# Altium PCB PCB_RULER.PcbDoc
Units mm, origin at the board's own origin, x right, y up, seen from the top; angles counter-clockwise.
Board outline 208.45 x 25.4 mm, 2 copper layers (Top Layer, Bottom Layer); 75 components, 2 nets, 326 pads, 20 vias.
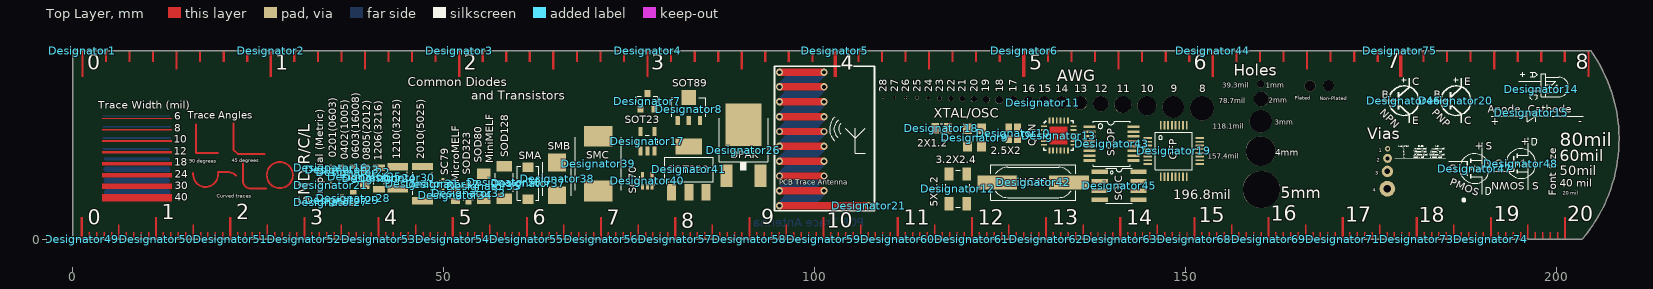
[diagram p0: Top Layer view]
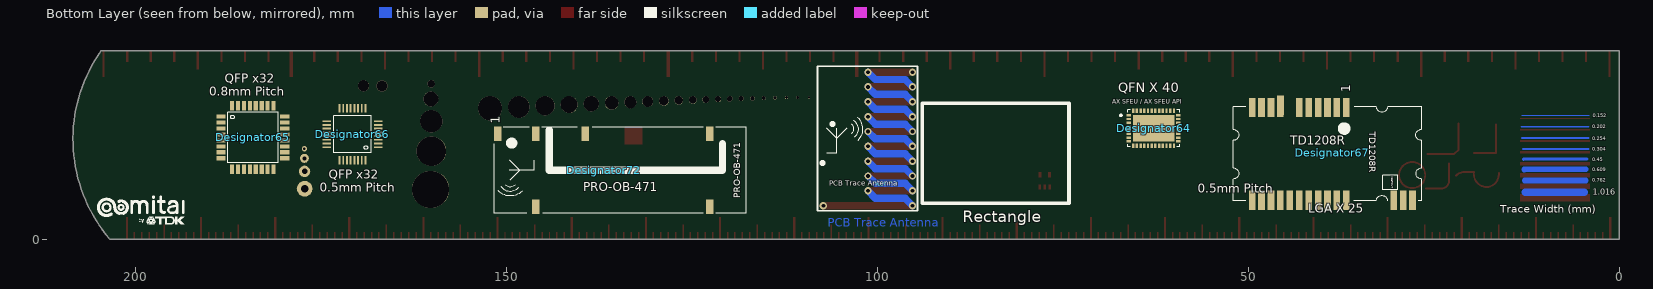
[diagram p1: Bottom Layer view, seen from below]

## Layer stack, top to bottom
Top Solder: solder mask 0.0102, Solder Resist, Dk 3.5
Top Layer: signal copper 0.0356
Dielectric1: dielectric 0.32, FR-4, Dk 4.8
Bottom Layer: signal copper 0.0356
Bottom Solder: solder mask 0.0102, Solder Resist, Dk 3.5

## Board outline
0,0 0,25.4 204.673,25.4 cw(c187.78,13.488) 203.444,0

## Design rules (kind name [scope] priority, off if disabled: settings)
Clearance [All] p1: gap=0.127 ignorepadtopadclearanceinfootprint=FALSE except(0: Arc-Hole Track-Hole SMDPad-Hole THPad-Hole Via-Hole Fill-Hole Poly-Hole Region-Hole Text-Hole)
HoleToHoleClearance [All] p1: gap=0.025 allowstackedmicrovias=TRUE
MinimumSolderMaskSliver [All] p1: minsoldermaskwidth=0.051
PolygonConnect [All] p1: connectstyle=Relief reliefconductorwidth=0.254 reliefentries=4 polygonreliefangle="90 Angle" airgapwidth=0.254
RoutingVias [All] p1: holewidth=0.711 width=1.27 viastyle="Through Hole" minholewidth=0.711 minwidth=1.27 maxholewidth=0.711 maxwidth=1.27
SilkToSilkClearance [All] p1: silktosilkclearance=0.051
SilkToSolderMaskClearance SilkscreenOverComponentPads [IsPad] p1: minsilkscreentomaskgap=0.051 clearancetoexposedcopper=TRUE
SolderMaskExpansion [All] p1: expansion=0.064 istentingtop=FALSE
Width [All] p1: maxlimit=0.254 minlimit=0.254 preferedwidth=0.254
26 further rules are at their usual default settings.

## Components (designator, comment, footprint, x,y, rotation, side; value= is the part's Value field where it differs from the comment)
Designator1 "Comment" EDGE-INCHES-EIGTH 1.27,25.4 r0 top (schematic designator E$17)
Designator2 "Comment" EDGE-INCHES-EIGTH 26.67,25.4 r0 top (schematic designator E$18)
Designator3 "Comment" EDGE-INCHES-EIGTH 52.07,25.4 r0 top (schematic designator E$19)
Designator4 "Comment" EDGE-INCHES-EIGTH 77.47,25.4 r0 top (schematic designator E$20)
Designator5 "Comment" EDGE-INCHES-EIGTH 102.72,25.4 r0 top (schematic designator E$21)
Designator6 "Comment" EDGE-INCHES-EIGTH 128.27,25.4 r0 top (schematic designator E$22)
Designator7 "Comment" SOT23-3 77.445,18.567 r0 top (schematic designator E$34)
Designator8 "Comment" SOT89 83.033,17.805 r0 top (schematic designator E$32)
Designator9 "Comment" CRYSTAL-SMD-3.2X2.5 121.564,13.716 r90 top (schematic designator E$37)
Designator10 "Comment" CRYSTAL-SMD-2.5X2 126.746,14.3 r90 top (schematic designator E$38)
Designator11 "Comment" ALL-HOLES 109.22,19.304 r0 top (schematic designator E$46)
Designator12 "Comment" CRYSTAL-SMD-5X3.2 119.304,6.807 r90 top (schematic designator E$36)
Designator13 "Comment" QFN-24 132.893,13.995 r0 top (schematic designator E$55)
Designator14 "Comment" LED-GUIDE 197.942,20.244 r270 top (schematic designator E$53)
Designator15 "Comment" DIODE-SYMB 196.647,17.069 r0 top (schematic designator E$52)
Designator16 "Comment" 0201 34.751,9.662 r90 top (schematic designator E$16)
Designator17 "Comment" SOT23-5 77.445,13.233 r0 top (schematic designator E$33)
Designator18 "Comment" XTAL-2X1.2 117.094,14.961 r0 top (schematic designator E$40)
Designator19 "Comment" TQFP32-5MM 148.412,11.913 r0 top (schematic designator E$58)
Designator20 "Comment" PNP-SYMB 186.461,18.694 r0 top (schematic designator E$59)
Designator21 "Comment" 0201 34.751,7.325 r90 top (schematic designator E$63)
Designator21 "Comment" "PCB antenna 868 MHz or 915/920 MHz" 107.264,4.547 r90 top
Designator22 "Comment" 0603 37.799,9.052 r90 top (schematic designator E$24)
Designator23 "Comment" 0402 36.275,9.357 r90 top (schematic designator E$23)
Designator24 "Comment" 1206 41.279,8.214 r90 top (schematic designator E$26)
Designator25 "Comment" 0805 39.323,8.468 r90 top (schematic designator E$25)
Designator26 "Comment" DPAK 90.399,13.868 r0 top (schematic designator E$29)
Designator27 "Comment" 0201 34.751,4.988 r90 top (schematic designator E$60)
Designator28 "Comment" 0603 37.799,5.572 r90 top (schematic designator E$62)
Designator29 "Comment" 0402 36.275,5.293 r90 top (schematic designator E$61)
Designator30 "Comment" 1210 43.79,8.306 r270 top (schematic designator E$27)
Designator31 "Comment" 2010 47.117,7.518 r90 top (schematic designator E$28)
Designator32 "Comment" SC79_INFINEON 49.886,7.417 r90 top (schematic designator E$42)
Designator33 "Comment" SOD-323 53.34,6.198 r270 top (schematic designator E$48)
Designator34 "Comment" MICROMELF-R 51.562,5.944 r90 top (schematic designator E$41)
Designator35 "Comment" SOD80C 55.372,7.137 r90 top (schematic designator E$49)
Designator36 "Comment" SOD-128 58.166,7.671 r90 top (schematic designator E$47)
Designator37 "Comment" SMA-DIODE 61.366,7.544 r270 top (schematic designator E$43)
Designator38 "Comment" SMB-DIODE 65.278,8.153 r90 top locked (schematic designator E$44)
Designator39 "Comment" SMC 70.815,10.211 r90 top (schematic designator E$45)
Designator40 "Comment" SC70 77.445,7.899 r0 top (schematic designator E$35)
Designator41 "Comment" SOT223 83.033,9.423 r0 top (schematic designator E$31)
Designator42 "Comment" HC49UP 129.464,7.671 r0 top (schematic designator E$39)
Designator43 "Comment" TSSOP16 139.929,12.954 r270 top (schematic designator E$56)
Designator44 "Comment" EDGE-INCHES-EIGTH 153.689,25.4 r0 top (schematic designator E$22)
Designator45 "Comment" SO08 141.046,7.214 r270 top (schematic designator E$57)
Designator46 "Comment" NPN-SYMB 179.451,18.694 r0 top (schematic designator E$54)
Designator47 "Comment" PMOS-SYMB 188.976,9.55 r0 top (schematic designator E$51)
Designator48 "Comment" NMOS-SYMB 195.224,10.211 r0 top (schematic designator E$50)
Designator49 "Comment" EDGE-MILLIMETERS 1.2,0 r0 top (schematic designator E$1)
Designator50 "Comment" EDGE-MILLIMETERS 11.2,0 r0 top (schematic designator E$2)
Designator51 "Comment" EDGE-MILLIMETERS 21.2,0 r0 top (schematic designator E$3)
Designator52 "Comment" EDGE-MILLIMETERS 31.2,0 r0 top (schematic designator E$4)
Designator53 "Comment" EDGE-MILLIMETERS 41.2,0 r0 top (schematic designator E$5)
Designator54 "Comment" EDGE-MILLIMETERS 51.2,0 r0 top (schematic designator E$6)
Designator55 "Comment" EDGE-MILLIMETERS 61.2,0 r0 top (schematic designator E$7)
Designator56 "Comment" EDGE-MILLIMETERS 71.2,0 r0 top (schematic designator E$8)
Designator57 "Comment" EDGE-MILLIMETERS 81.2,0 r0 top (schematic designator E$9)
Designator58 "Comment" EDGE-MILLIMETERS 91.2,0 r0 top (schematic designator E$10)
Designator59 "Comment" EDGE-MILLIMETERS 101.2,0 r0 top (schematic designator E$11)
Designator60 "Comment" EDGE-MILLIMETERS 111.2,0 r0 top (schematic designator E$12)
Designator61 "Comment" EDGE-MILLIMETERS 121.2,0 r0 top (schematic designator E$13)
Designator62 "Comment" EDGE-MILLIMETERS 131.2,0 r0 top (schematic designator E$14)
Designator63 "Comment" EDGE-MILLIMETERS 141.2,0 r0 top (schematic designator E$15)
Designator64 "Comment" QFN50P700X500X100-40N 62.759,14.973 r180 bottom
Designator65 "Comment" TQFP32-08 184.201,13.741 r0 bottom locked (schematic designator E$69)
Designator66 "Comment" TQFP32-5MM 170.764,14.173 r0 bottom locked (schematic designator E$70)
Designator67 "Comment" LGA25 38.659,11.532 r270 bottom locked
Designator68 "Comment" EDGE-MILLIMETERS 151.206,0 r0 top (schematic designator E$15)
Designator69 "Comment" EDGE-MILLIMETERS 161.19,0 r0 top (schematic designator E$15)
Designator71 "Comment" EDGE-MILLIMETERS 171.173,0 r0 top (schematic designator E$15)
Designator72 "Comment" PRO-OB-471 136.881,9.322 r90 bottom locked
Designator73 "Comment" EDGE-MILLIMETERS 181.169,0 r0 top (schematic designator E$15)
Designator74 "Comment" EDGE-MILLIMETERS 191.169,0 r0 top (schematic designator E$15)
Designator75 "Comment" EDGE-INCHES-EIGTH 178.916,25.4 r0 top (schematic designator E$22)

## Footprints (in the part's own frame and the unit in brackets; to place one, negate y for a bottom-side part, rotate by r counter-clockwise, add the part's x,y. Pads: shape width x height; smd on the part's side, far side on the other; paste and mask are expansions set on the pad)
0201 [mm]
  rect 0.3x0.3 smd: P$1(-0.3,0) P$2(0.3,0)
0402 [mm]
  rect 0.5x0.6 smd: 1(-0.5,0) 2(0.5,0)
  silkscreen extent -0.1,-0.2 0.1,0.2
0603 [mm]
  rect 0.6x0.9 smd: 1(-0.75,0) 2(0.75,0)
  silkscreen extent -0.25,-0.35 0.25,0.35
0805 [mm]
  rect 1.2x1.3 smd: 1(-1.05,0) 2(1.05,0)
  silkscreen extent -0.2,-0.55 0.2,0.55
1206 [mm]
  rect 0.9x1.6 smd: 1(-1.45,0) 2(1.45,0)
  silkscreen extent -0.8,-0.7 0.8,0.7
1210 [mm]
  rect 1x2.8 smd: 1(-1.5,0) 2(1.5,0)
  silkscreen extent -0.8,-1.3 0.8,1.3
2010 [mm]
  rect 1x2.8 smd: P$1(-2.3,0) P$2(2.3,0)
  silkscreen extent -1.5,-1.3 1.5,1.3
ALL-HOLES [mm]
  round 0.321 hole 0.321 unplated: ""(0,-0.161)
  round 0.361 hole 0.361 unplated: ""(1.524,-0.18)
  round 0.405 hole 0.405 unplated: ""(3.048,-0.202)
  round 0.455 hole 0.455 unplated: ""(4.572,-0.228)
  round 0.511 hole 0.511 unplated: ""(6.096,-0.255)
  round 0.573 hole 0.573 unplated: ""(7.62,-0.287)
  round 0.644 hole 0.644 unplated: ""(9.144,-0.322)
  round 0.723 hole 0.723 unplated: ""(10.668,-0.361)
  round 0.812 hole 0.812 unplated: ""(12.235,-0.406)
  round 0.912 hole 0.912 unplated: ""(13.898,-0.456)
  round 1.02 hole 1.02 unplated: ""(15.663,-0.51)
  round 1.15 hole 1.15 unplated: ""(17.549,-0.575)
  round 1.29 hole 1.29 unplated: ""(19.568,-0.645)
  round 1.45 hole 1.45 unplated: ""(21.739,-0.725)
  round 1.63 hole 1.63 unplated: ""(24.078,-0.815)
  round 1.83 hole 1.83 unplated: ""(26.609,-0.915)
  round 2.05 hole 2.05 unplated: ""(29.348,-1.025)
  round 2.3 hole 2.3 unplated: ""(32.324,-1.15)
  round 2.59 hole 2.59 unplated: ""(35.568,-1.295)
  round 2.91 hole 2.91 unplated: ""(39.119,-1.455)
  round 3.26 hole 3.26 unplated: ""(43.003,-1.63)
CRYSTAL-SMD-2.5X2 [mm]
  rect 1.05x0.9 smd: 1(-0.795,-0.6) 2(0.795,-0.6) 3(0.795,0.6) 4(-0.795,0.6)
CRYSTAL-SMD-3.2X2.5 [mm]
  rect 1.4x1.2 smd: 1(-1.2,-0.95) 2(1.2,-0.95) 3(1.2,0.95) 4(-1.2,0.95)
CRYSTAL-SMD-5X3.2 [mm]
  rect 1.8x1.2 smd: 1(-2,-1.2) 2(2,-1.2) 3(2,1.2) 4(-2,1.2)
  silkscreen extent -2.5,-1.6 2.5,1.6
DIODE-SYMB [mm]
  silkscreen extent -5.4,-1.2 7,0.2
DPAK [mm]
  rect 1.6x3 smd: 1(-2.28,-5.31) 3(2.28,-5.31)
  rect 4.826x5.715 smd: 4(0,1.588)
  silkscreen extent -3.28,-4.59 3.28,2.47
EDGE-INCHES-EIGTH [mm]
  Top Layer region: 25.25,-3.5 25.55,-3.5 25.55,0 25.25,0
  Top Layer region: 22.075,-1.5 22.375,-1.5 22.375,0 22.075,0
  Top Layer region: 18.9,-1.5 19.2,-1.5 19.2,0 18.9,0
  Top Layer region: 15.725,-1.5 16.025,-1.5 16.025,0 15.725,0
  Top Layer region: 12.55,-2.5 12.85,-2.5 12.85,0 12.55,0
  Top Layer region: 9.375,-1.5 9.675,-1.5 9.675,0 9.375,0
  Top Layer region: 6.2,-1.5 6.5,-1.5 6.5,0 6.2,0
  Top Layer region: 3.025,-1.5 3.325,-1.5 3.325,0 3.025,0
  Top Layer region: -0.15,-3.5 0.15,-3.5 0.15,0 -0.15,0
EDGE-MILLIMETERS [mm]
  Top Layer region: -0.15,0 0.15,0 0.15,3 -0.15,3
  Top Layer region: 0.9,0 1.1,0 1.1,1 0.9,1
  Top Layer region: 1.9,0 2.1,0 2.1,1 1.9,1
  Top Layer region: 2.9,0 3.1,0 3.1,1 2.9,1
  Top Layer region: 4.9,0 5.1,0 5.1,2 4.9,2
  Top Layer region: 3.9,0 4.1,0 4.1,1 3.9,1
  Top Layer region: 5.9,0 6.1,0 6.1,1 5.9,1
  Top Layer region: 6.9,0 7.1,0 7.1,1 6.9,1
  Top Layer region: 7.9,0 8.1,0 8.1,1 7.9,1
  Top Layer region: 8.9,0 9.1,0 9.1,1 8.9,1
  Top Layer region: 9.85,0 10.15,0 10.15,3 9.85,3
HC49UP [mil]
  rect 210x76 smd: 1(-190,0) 2(190,0)
  silkscreen extent -225,-95 225,95
LED-GUIDE [mm]
  silkscreen extent -2.3,-3 1.37,3.7
LGA25 [mm]
  rect 2.6x0.89 smd: 1(-6.25,1.89) 2(-6.25,0.62) 3(-6.25,-0.65) 4(-6.25,-1.92) 5(-6.25,-3.19) 6(-6.25,-4.46) 7(-6.553,-6.985) 8(-6.25,-7) 9(-6.25,-8.27) 10(-6.25,-9.54) 11(-6.25,-10.81) 12(6.25,-10.81) 13(6.25,-9.54) 14(6.25,-8.27) 15(6.25,-7) 16(6.25,-5.73) 17(6.25,-4.46) 18(6.25,-3.19) 19(6.25,-1.92) 20(6.25,-0.65) 21(6.25,0.62) 22(6.25,1.89) 23(6.25,8.27) 24(6.25,9.54) 25(6.25,10.81)
  silkscreen extent -6.35,-13.35 6.35,12.05
MICROMELF-R [mm]
  rect 0.8x1.2 smd: A(0.8,0) C(-0.8,0)
  silkscreen extent -0.23,-0.55 0.23,0.55
NMOS-SYMB [mm]
  silkscreen extent -3.5,-3.5 2.15,3.5
NPN-SYMB [mm]
  silkscreen extent -3,-3 2,3.1
"PCB antenna 868 MHz or 915/920 MHz" [mm] "Design Note DN038, CC11xx/CC12xx"
  Top Layer lines w1: 0,12 0,0 ; 2,12 2,6 ; 4,12 4,6 ; 6,12 6,6 ; 8,12 8,6 ; 10,12 10,6 ; 12,12 12,6 ; 14,12 14,6 ; 16,12 16,6 ; 18,12 18,6
  Bottom Layer lines w1: 2,12 3,11 3,7 4,6 ; 4,12 5,11 5,7 6,6 ; 6,12 7,11 7,7 8,6 ; 8,12 9,11 9,7 10,6 ; 10,12 11,11 11,7 12,6 ; 12,12 13,11 13,7 14,6 ; 14,12 15,11 15,7 16,6 ; 16,12 17,11 17,7 18,6 ; 2,6 1,7 1,11 0,12 ; 0,12 0,12
  silkscreen extent -0.69,-0.81 18.8,12.7
PMOS-SYMB [mm]
  silkscreen extent -3.5,-3.5 2.15,3.5
PNP-SYMB [mm]
  silkscreen extent -3,-3 2,3.1
PRO-OB-471 [mm]
  rect 1.95x1 smd: 1(4.9,14.3) 2(4.9,9.2) 3(-4.9,9.2) 4(-4.9,-14.3) 5(4.9,-14.3) 6(4.9,2.5)
  silkscreen extent -5.8,-19.2 5.8,14.8
QFN50P700X500X100-40N [mm] "QFN, 40-Leads, Body 5.0x7.0mm (max), Pitch 0.50mm, IPC Medium Density"
  rect 0.6x0.32 smd: 1(-3.35,1.75) 2(-3.35,1.25) 3(-3.35,0.75) 4(-3.35,0.25) 5(-3.35,-0.25) 6(-3.35,-0.75) 7(-3.35,-1.25) 8(-3.35,-1.75) 21(3.35,-1.75) 22(3.35,-1.25) 23(3.35,-0.75) 24(3.35,-0.25) 25(3.35,0.25) 26(3.35,0.75) 27(3.35,1.25) 28(3.35,1.75)
  rect 0.32x0.6 smd: 9(-2.75,-2.35) 10(-2.25,-2.35) 11(-1.75,-2.35) 12(-1.25,-2.35) 13(-0.75,-2.35) 14(-0.25,-2.35) 15(0.25,-2.35) 16(0.75,-2.35) 17(1.25,-2.35) 18(1.75,-2.35) 19(2.25,-2.35) 20(2.75,-2.35) 29(2.75,2.35) 30(2.25,2.35) 31(1.75,2.35) 32(1.25,2.35) 33(0.75,2.35) 34(0.25,2.35) 35(-0.25,2.35) 36(-0.75,2.35) 37(-1.25,2.35) 38(-1.75,2.35) 39(-2.25,2.35) 40(-2.75,2.35)
  rect 5.6x3.6 smd: 41(0,0)
  silkscreen extent -4.52,-2.5 3.5,2.5, body extent -3.5,-2.5 3.5,2.5, height 1
QFN-24 [mm]
  rect 0.8x0.25 smd: 1(-2,1.25) 2(-2,0.75) 3(-2,0.25) 4(-2,-0.25) 5(-2,-0.75) 6(-2,-1.25) 13(2,-1.25) 14(2,-0.75) 15(2,-0.25) 16(2,0.25) 17(2,0.75) 18(2,1.25)
  rect 0.25x0.8 smd: 7(-1.25,-2) 8(-0.75,-2) 9(-0.25,-2) 10(0.25,-2) 11(0.75,-2) 12(1.25,-2) 19(1.25,2) 20(0.75,2) 21(0.25,2) 22(-0.25,2) 23(-0.75,2) 24(-1.25,2)
  Top Layer region: -1.2,-1.2 1.2,-1.2 1.2,1.2 -1.2,1.2
  silkscreen extent -2,-2 2,2
SC70 [mm]
  rect 0.4x0.75 smd: 1(-0.65,-0.825) 2(0,-0.825) 3(0.65,-0.825) 4(0.65,0.825) 5(-0.65,0.825)
  Top Layer region: -0.85,0.45 -0.45,0.45 -0.45,1.2 -0.85,1.2
  Top Layer region: 0.45,0.45 0.85,0.45 0.85,1.2 0.45,1.2
  Top Layer region: -0.838,-1.168 -0.508,-1.168 -0.508,-0.483 -0.838,-0.483
  Top Layer region: -0.165,-1.168 0.165,-1.168 0.165,-0.483 -0.165,-0.483
  Top Layer region: 0.508,-1.168 0.838,-1.168 0.838,-0.483 0.508,-0.483
  silkscreen extent -1,-0.62 1,0.62
SC79_INFINEON [mm]
  rect 0.35x0.35 smd: A(0.675,0) C(-0.675,0)
  silkscreen extent -0.55,-0.35 0.55,0.35
SMA-DIODE [mm]
  rect 1.27x1.47 smd: A(-2.15,0) C(2.15,0)
  silkscreen extent -2.3,-1.45 2.3,1.45
SMB-DIODE [mm]
  rect 2.4x2.4 smd: A(2.2,0) C(-2.2,0)
  silkscreen extent -2.26,-1.91 2.26,1.91
SMC [mm]
  rect 2.8x3.8 smd: A(3.7,0) C(-3.7,0)
  silkscreen extent -3.56,-3.1 3.56,3.1
SO08 [mil]
  rect 24x87 smd: 1(-75,-103) 2(-25,-103) 3(25,-103) 4(75,-103) 5(75,103) 6(25,103) 7(-25,103) 8(-75,103)
  silkscreen extent -93,-71 93,71
SOD80C [mm]
  rect 1.4x1.8 smd: A(1.7,0) C(-1.7,0)
  silkscreen extent -0.76,-0.79 0.76,0.79
SOD-128 [mm]
  rect 1.4x2.1 smd: A(2.2,0) C(-2.2,0)
  silkscreen extent -1.27,-1.2 1.27,1.2
SOD-323 [mm]
  rect 0.63x0.83 smd: 1(-1.15,0) 2(1.15,0)
  silkscreen extent -0.9,-0.65 0.9,0.65
SOT23-3 [mm]
  rect 0.8x0.9 smd: 1(-0.95,-1) 2(0.95,-1) 3(0,1.1)
  silkscreen extent -1.4,-0.1 1.4,0.7
SOT23-5 [mm]
  rect 0.55x1.2 smd: 1(-0.95,-1.3) 2(0,-1.3) 3(0.95,-1.3) 4(0.95,1.3) 5(-0.95,1.3)
  silkscreen extent -1.42,-0.43 1.42,0.81
SOT89 [mm]
  rect 0.58x1.2 smd: 1(-1.5,-1.8) 2(0,-1.8) 3(1.5,-1.8)
  rect 2x2 smd: 4(0,1.3)
  silkscreen extent -2.3,-1.3 2.3,1.31
SOT223 [mil]
  rect 48x88 smd: 1(-91,-122) 2(0,-122) 3(91,-122)
  rect 141.73x86.61 smd: 4(0,122.01)
  silkscreen extent -129,-65 129,65
TQFP32-5MM [mil]
  rect 45x10 smd: 1(-137.8,68.9) 2(-137.8,49.21) 3(-137.8,29.53) 4(-137.8,9.84) 5(-137.8,-9.84) 6(-137.8,-29.53) 7(-137.8,-49.21) 8(-137.8,-68.9) 17(137.8,-68.9) 18(137.8,-49.21) 19(137.8,-29.53) 20(137.8,-9.84) 21(137.8,9.84) 22(137.8,29.53) 23(137.8,49.21) 24(137.8,68.9)
  rect 10x45 smd: 9(-68.9,-137.8) 10(-49.21,-137.8) 11(-29.53,-137.8) 12(-9.84,-137.8) 13(9.84,-137.8) 14(29.53,-137.8) 15(49.21,-137.8) 16(68.9,-137.8) 25(68.9,137.8) 26(49.21,137.8) 27(29.53,137.8) 28(9.84,137.8) 29(-9.84,137.8) 30(-29.53,137.8) 31(-49.21,137.8) 32(-68.9,137.8)
  silkscreen extent -98,-98 98,98
TQFP32-08 [mil]
  rect 50x22 smd: 1(169,-110.24) 2(169,-78.74) 3(169,-47.24) 4(169,-15.75) 5(169,15.75) 6(169,47.24) 7(169,78.74) 8(169,110.24) 17(-169,110.24) 18(-169,78.74) 19(-169,47.24) 20(-169,15.75) 21(-169,-15.75) 22(-169,-47.24) 23(-169,-78.74) 24(-169,-110.24)
  rect 22x50 smd: 9(110.24,169) 10(78.74,169) 11(47.24,169) 12(15.75,169) 13(-15.75,169) 14(-47.24,169) 15(-78.74,169) 16(-110.24,169) 25(-110.24,-169) 26(-78.74,-169) 27(-47.24,-169) 28(-15.75,-169) 29(15.75,-169) 30(47.24,-169) 31(78.74,-169) 32(110.24,-169)
  silkscreen extent -134,-134 134,134
TSSOP16 [mm]
  rect 0.35x1.6 smd: 1(-2.225,-2.85) 2(-1.575,-2.85) 3(-0.925,-2.85) 4(-0.275,-2.85) 5(0.375,-2.85) 6(1.025,-2.85) 7(1.675,-2.85) 8(2.325,-2.85) 9(2.325,3.05) 10(1.675,3.05) 11(1.025,3.05) 12(0.375,3.05) 13(-0.275,3.05) 14(-0.925,3.05) 15(-1.575,3.05) 16(-2.225,3.05)
  silkscreen extent -3,-2.4 3.1,2.6
XTAL-2X1.2 [mm]
  rect 1x1.4 smd: P$1(-0.85,0) P$2(0.85,0)
  silkscreen extent -0.15,-0.6 0.15,0.6

## Free pads (board coordinates)
  round 1 hole 1: 1(160.147,20.98)
  round 0.711 hole 0.33: 1(177.242,12.218)
  round 1.2 hole 0.52: 2(177.241,10.918)
  round 1.524 hole 0.762: 3(177.216,9.169)
  round 2 hole 2: 4(160.198,18.923)
  round 3 hole 3: 5(160.147,15.926)
  round 4 hole 4: 6(160.122,11.887)
  round 5 hole 5: 7(160.223,6.731)
  round 1.5 hole 1.5: 8(166.776,20.676)
  round 1.5 hole 1.5 unplated: 9(169.266,20.701)
  round 2.124 hole 1: 13(177.216,6.833)

## Via types
v1: diameter 1, hole 0.5, Top Layer to Bottom Layer, 20 vias

## Nets (pads, with @x,y where several pads share a name; then routed paths per layer and width w, separated by ;. In a path a pad name is that pad's centre, name@x,y a point inside that pad or via, vN(x,y) a via of type N, cw(c..) or ccw(c..) an arc to the next point about the centre after c; other vN are vias at no path point)
ANT_FEED: 
  other v1: 95.264,4.547 107.264,4.547 95.264,6.547 101.264,6.547 95.264,8.547 101.264,8.547 95.264,10.547 101.264,10.547 95.264,12.547 101.264,12.547 95.264,14.547 101.264,14.547 95.264,16.547 101.264,16.547 95.264,18.547 101.264,18.547 95.264,20.547 101.264,20.547 95.264,22.547 101.264,22.547
S$1: 
pads on no net: Designator7.1 Designator7.2 Designator7.3 Designator8.1 Designator8.2 Designator8.3 Designator8.4 Designator9.1 Designator9.2 Designator9.3 Designator9.4 Designator10.1 Designator10.2 Designator10.3 Designator10.4 Designator11. Designator12.1 Designator12.2 Designator12.3 Designator12.4 Designator13.1 Designator13.2 Designator13.3 Designator13.4 Designator13.5 Designator13.6 Designator13.7 Designator13.8 Designator13.9 Designator13.10 Designator13.11 Designator13.12 Designator13.13 Designator13.14 Designator13.15 Designator13.16 Designator13.17 Designator13.18 Designator13.19 Designator13.20 Designator13.21 Designator13.22 Designator13.23 Designator13.24 Designator16.P$1 Designator16.P$2 Designator17.1 Designator17.2 Designator17.3 Designator17.4 Designator17.5 Designator18.P$1 Designator18.P$2 Designator19.1 Designator19.2 Designator19.3 Designator19.4 Designator19.5 Designator19.6 Designator19.7 Designator19.8 Designator19.9 Designator19.10 Designator19.11 Designator19.12 Designator19.13 Designator19.14 Designator19.15 Designator19.16 Designator19.17 Designator19.18 Designator19.19 Designator19.20 Designator19.21 Designator19.22 Designator19.23 Designator19.24 Designator19.25 Designator19.26 Designator19.27 Designator19.28 Designator19.29 Designator19.30 Designator19.31 Designator19.32 Designator21.P$1 Designator21.P$2 Designator22.1 Designator22.2 Designator23.1 Designator23.2 Designator24.1 Designator24.2 Designator25.1 Designator25.2 Designator26.1 Designator26.3 Designator26.4 Designator27.P$1 Designator27.P$2 Designator28.1 Designator28.2 Designator29.1 Designator29.2 Designator30.1 Designator30.2 Designator31.P$1 Designator31.P$2 Designator32.A Designator32.C Designator33.1 Designator33.2 Designator34.A Designator34.C Designator35.A Designator35.C Designator36.A Designator36.C Designator37.A Designator37.C Designator38.A Designator38.C Designator39.A Designator39.C Designator40.1 Designator40.2 Designator40.3 Designator40.4 Designator40.5 Designator41.1 Designator41.2 Designator41.3 Designator41.4 Designator42.1 Designator42.2 Designator43.1 Designator43.2 Designator43.3 Designator43.4 Designator43.5 Designator43.6 Designator43.7 Designator43.8 Designator43.9 Designator43.10 Designator43.11 Designator43.12 Designator43.13 Designator43.14 Designator43.15 Designator43.16 Designator45.1 Designator45.2 Designator45.3 Designator45.4 Designator45.5 Designator45.6 Designator45.7 Designator45.8 Designator64.1 Designator64.2 Designator64.3 Designator64.4 Designator64.5 Designator64.6 Designator64.7 Designator64.8 Designator64.9 Designator64.10 Designator64.11 Designator64.12 Designator64.13 Designator64.14 Designator64.15 Designator64.16 Designator64.17 Designator64.18 Designator64.19 Designator64.20 Designator64.21 Designator64.22 Designator64.23 Designator64.24 Designator64.25 Designator64.26 Designator64.27 Designator64.28 Designator64.29 Designator64.30 Designator64.31 Designator64.32 Designator64.33 Designator64.34 Designator64.35 Designator64.36 Designator64.37 Designator64.38 Designator64.39 Designator64.40 Designator64.41 Designator65.1 Designator65.2 Designator65.3 Designator65.4 Designator65.5 Designator65.6 Designator65.7 Designator65.8 Designator65.9 Designator65.10 Designator65.11 Designator65.12 Designator65.13 Designator65.14 Designator65.15 Designator65.16 Designator65.17 Designator65.18 Designator65.19 Designator65.20 Designator65.21 Designator65.22 Designator65.23 Designator65.24 Designator65.25 Designator65.26 Designator65.27 Designator65.28 Designator65.29 Designator65.30 Designator65.31 Designator65.32 Designator66.1 Designator66.2 Designator66.3 Designator66.4 Designator66.5 Designator66.6 Designator66.7 Designator66.8 Designator66.9 Designator66.10 Designator66.11 Designator66.12 Designator66.13 Designator66.14 Designator66.15 Designator66.16 Designator66.17 Designator66.18 Designator66.19 Designator66.20 Designator66.21 Designator66.22 Designator66.23 Designator66.24 Designator66.25 Designator66.26 Designator66.27 Designator66.28 Designator66.29 Designator66.30 Designator66.31 Designator66.32 Designator67.1 Designator67.2 Designator67.3 Designator67.4 Designator67.5 Designator67.6 Designator67.7 Designator67.8 Designator67.9 Designator67.10 Designator67.11 Designator67.12 Designator67.13 Designator67.14 Designator67.15 Designator67.16 Designator67.17 Designator67.18 Designator67.19 Designator67.20 Designator67.21 Designator67.22 Designator67.23 Designator67.24 Designator67.25 Designator72.1 Designator72.2 Designator72.3 Designator72.4 Designator72.5 Designator72.6
copper on no net: | length 109.2
  Top Layer w0.254: 16.205,8.941 ccw(c17.97,8.801) 17.831,7.036 ccw(c17.793,8.826) 19.567,9.069 20.864,9.069 cw(c20.864,7.504) 21.971,8.611 ; 16.573,15.507 16.573,11.646 19.545,11.646 ; 21.628,15.659 21.628,12.103 22.212,11.519 22.314,11.519 25.845,11.519 ; 22.936,10.211 22.936,7.849 ccw(c23.927,7.849) 23.927,6.858 26.028,6.858 ; 29.647,8.661 ccw(c27.889,8.661) 29.647,8.661
  Bottom Layer w0.152: 4.039,16.688 13.106,16.688
  Bottom Layer w0.203: 4.064,15.215 13.183,15.189
  Bottom Layer w0.254: 4.115,13.691 13.081,13.691
  Bottom Layer w0.305: 4.166,12.192 12.954,12.192
  Bottom Layer w0.457: 4.318,10.831 12.878,10.82
  Bottom Layer w0.762: 4.496,7.925 12.7,7.925 ; 4.496,9.474 12.802,9.423
  Bottom Layer w1.016: 4.699,6.375 12.624,6.325

## Other copper
Top Layer:
  rectangle: 3.937,14.681 13.335,14.884
  rectangle: 3.937,5.131 13.335,6.147
  rectangle: 3.937,6.782 13.335,7.544
  rectangle: 3.937,8.357 13.335,8.966
  rectangle: 3.937,9.982 13.335,10.439
  rectangle: 3.937,11.582 13.335,11.887
  rectangle: 3.937,13.132 13.335,13.386
  rectangle: 3.937,16.231 13.335,16.383
Bottom Layer:
  text "PCB Trace Antenna" at 106.705,1.702 h1.14

## Silkscreen, mask and mechanical layers (free items; w line width, h text height)
Top Overlay:
  drawing of 127 lines, arcs and shapes, not listed
  text "7" at 177.12,23.042 h2
  text "8" at 202.641,22.936 h2
  text "0" at 1.937,22.86 h2
  text "1" at 27.305,22.86 h2
  text "2" at 52.705,22.86 h2
  text "3" at 77.978,22.86 h2
  text "4" at 103.505,22.86 h2
  text "5" at 128.905,22.86 h2
  text "6" at 151.13,22.86 h2
  text "Holes" at 156.489,22.073 h1.52
  text "AWG" at 132.69,21.336 h1.52
  text "Common Diodes" at 45.136,20.65 h1.2
  text "SOT89" at 80.823,20.599 h1.02
  text "1mm" at 160.807,20.447 h0.7
  text "39.3mil" at 154.965,20.422 h0.7
  text "28" at 109.728,19.812 h1.02 r90
  text "27" at 111.252,19.812 h1.02 r90
  text "26" at 112.776,19.812 h1.02 r90
  text "25" at 114.3,19.812 h1.02 r90
  text "24" at 115.824,19.812 h1.02 r90
  text "23" at 117.348,19.812 h1.02 r90
  text "22" at 118.872,19.812 h1.02 r90
  text "21" at 120.396,19.812 h1.02 r90
  text "20" at 121.971,19.812 h1.02 r90
  text "19" at 123.546,19.812 h1.02 r90
  text "18" at 125.4,19.812 h1.02 r90
  text "17" at 127.254,19.812 h1.02 r90
  text "16" at 127.965,19.812 h1.02
  text "15" at 130.124,19.812 h1.02
  text "14" at 132.461,19.812 h1.02
  text "13" at 135.001,19.812 h1.02
  text "12" at 137.744,19.812 h1.02
  text "11" at 140.716,19.812 h1.02
  text "10" at 143.942,19.812 h1.02
  text "9" at 147.98,19.812 h1.02
  text "8" at 151.867,19.812 h1.02
  text "and Transistors" at 53.696,18.847 h1.2
  text "Plated" at 164.719,18.796 h0.5
  text "Non-Plated" at 168.072,18.745 h0.5
  text "2mm" at 161.239,18.39 h0.7
  text "78.7mil" at 154.483,18.339 h0.7
  text "Trace Width (mil)" at 3.378,17.602 h1.02
  text "XTAL/OSC" at 116.027,16.408 h1.27
  text "Trace Angles" at 15.443,16.234 h1
  text "6" at 13.64,16.129 h1.02
  text "SOT23" at 74.397,15.646 h1.02
  text "3mm" at 162.027,15.443 h0.7
  text "118.1mil" at 153.67,14.935 h0.7
  text "8" at 13.665,14.503 h1.02
  text "Vias" at 174.473,13.513 h1.52
  text "10" at 13.564,13.005 h1.02
  text "QFN" at 129.794,12.573 h1.02 r90
  text "80mil" at 200.482,12.573 h1.8
  text "2X1.2" at 113.817,12.497 h1.02
  text "SMB" at 63.983,12.09 h1.02
  text "1" at 176.073,11.76 h0.5
  text "2.5X2" at 123.723,11.506 h1.02
  text "12" at 13.564,11.405 h1.02
  text "4mm" at 162.128,11.252 h0.9
  text "SSOP" at 140.437,11.176 h1.02 r90
  text "SOD128" at 58.674,11.074 h1.02 r90
  text "0201(0603)" at 35.488,10.983 h1.02 r90
  text "DPAK" at 88.621,10.947 h1.02
  text "157.4mil" at 153.01,10.897 h0.7
  text "SMC" at 69.215,10.846 h1.02
  text "1210(3225)" at 44.094,10.82 h1.02 r90
  text "2010(5025)" at 47.396,10.82 h1.02 r90
  text "SMA" at 60.071,10.82 h1.02
  text "0603(16008)" at 38.586,10.779 h1.02 r90
  text "0402(1005)" at 37.088,10.754 h1.02 r90
  text "QFP" at 148.819,10.744 h1.02 r90
  text "0805(2012)" at 40.085,10.678 h1.02 r90
  text "1206(3216)" at 41.609,10.627 h1.02 r90
  text "60mil" at 200.482,10.541 h1.52
  text "2" at 175.793,10.465 h0.5
  text "45 degrees" at 21.387,10.414 h0.5
  text "90 degrees" at 15.672,10.338 h0.5
  text "SOD80" at 55.143,10.312 h1.02 r90
  text "MiniMELF" at 56.667,10.287 h1.02 r90
  text "3.2X2.4" at 116.332,10.236 h1.02
  text "18" at 13.64,9.931 h1.02
  text "SOT223" at 80.213,8.89 h1.02
  text "3" at 175.565,8.738 h0.5
  text "SOD323" at 53.594,8.687 h1.02 r90
  text "SC79" at 50.571,8.661 h1.02 r90
  text "50mil" at 200.482,8.636 h1.27
  text "24" at 13.691,8.306 h1.02
  text "MicroMELF" at 52.07,7.671 h1.02 r90
  text "PCB Trace Antenna" at 95.225,7.341 h0.68
  text "HC49" at 127.584,7.214 h1.02
  text "40 mil" at 200.482,7.061 h1.02
  text "30" at 13.741,6.782 h1.02
  text "4" at 175.26,6.426 h0.5
  text "SC70" at 75.921,6.121 h1.02 r90
  text "20 mil" at 200.863,6.02 h0.51
  text "Font Size" at 199.974,5.893 h1.02 r90
  text "Imperial (Metric)" at 33.76,5.75 h1.02 r90
  text "Curved traces" at 19.382,5.577 h0.5
  text "5mm" at 162.814,5.563 h1.52
  text "196.8mil" at 148.361,5.436 h1.3
  text "SOIC" at 141.503,5.232 h1.02 r90
  text "40" at 13.716,5.182 h1.02
  text "SMD R/C/L" at 31.906,4.582 h1.52 r90
  text "5X3.2" at 116.611,4.369 h1.02 r90
  text "1" at 12.004,2.721 h2
  text "2" at 22.004,2.721 h2
  text "16" at 161.522,2.516 h2
  text "19" at 191.53,2.457 h2
  text "20" at 201.473,2.438 h2
  text "17" at 171.565,2.381 h2
  text "18" at 181.471,2.33 h2
  text "15" at 151.769,2.287 h2
  text "0" at 2,2 h2
  text "3" at 32,2 h2
  text "4" at 42,2 h2
  text "5" at 52,2 h2
  text "6" at 62,2 h2
  text "7" at 72,2 h2
  text "9" at 92.786,2.007 h2
  text "11" at 112,2 h2
  text "12" at 122,2 h2
  text "13" at 132,2 h2
  text "14" at 142,2 h2
  text "10" at 101.6,1.575 h2
  text "8" at 82,1.492 h2
Bottom Overlay:
  drawing of 30 lines, arcs and shapes, not listed
  text "QFP x32" at 188.011,21.107 h1.2
  text "0.8mm Pitch" at 190.043,19.329 h1.2
  text "0.152" at 3.556,16.434 h0.5
  text "0.202" at 3.581,14.961 h0.5
  text "0.254" at 3.632,13.335 h0.5
  text "TD1208R" at 44.31,12.763 h1.2
  text "0.304" at 3.581,11.938 h0.5
  text "0.45" at 3.607,10.516 h0.5
  text "0.609" at 3.632,9.169 h0.5
  text "QFP x32" at 173.939,8.204 h1.2
  text "0.762" at 3.632,7.772 h0.5
  text "PCB Trace Antenna" at 106.477,7.214 h0.7
  text "PRO-OB-471" at 139.624,6.502 h1.2
  text "0.5mm Pitch" at 175.209,6.426 h1.2
  text "0.5mm Pitch" at 56.794,6.274 h1.2
  text "1.016" at 3.556,5.994 h0.8
  text "Trace Width (mm)" at 16.027,3.607 h1.02
  text "LGA X 25" at 41.885,3.607 h1.2
  text "Rectangle" at 88.468,2.337 h1.52
Top Solder:
  circle w0.5: c27.889,8.661 r1.758
  region: 16.828,11.544 16.828,15.71 16.319,15.71 16.319,11.544
  region: 22.216,11.271 22.575,11.63 21.743,12.462 21.383,12.103
  region: 26.048,11.773 22.219,11.773 22.219,11.265 26.048,11.265
  region: 21.891,12.103 21.891,15.855 21.383,15.855 21.383,12.103
  rectangle: 16.319,11.417 19.748,11.925
  rectangle: 3.937,13.005 13.335,13.513
  rectangle: 3.937,5.055 13.335,6.223
  rectangle: 3.937,14.554 13.335,15.011
  rectangle: 3.937,16.104 13.335,16.51
  rectangle: 3.937,11.506 13.335,11.963
  rectangle: 3.937,6.706 13.335,7.62
  rectangle: 3.937,8.28 13.335,9.042
  rectangle: 3.937,9.906 13.335,10.516
  lines w0.5: 16.204,8.942 ccw(c17.969,8.802) 17.829,7.037 ccw(c17.791,8.828) 19.566,9.07 20.863,9.07 ; 20.888,9.07 cw(c20.888,7.505) 21.995,8.612 ; 22.911,10.262 22.911,7.899 ccw(c23.901,7.899) 23.901,6.909 26.003,6.909
Bottom Solder:
  rectangle: 3.937,5.639 13.335,7.112
  rectangle: 3.937,7.315 13.335,8.763
  rectangle: 3.937,8.992 13.335,9.957
  rectangle: 3.937,15.011 13.335,15.418
  rectangle: 3.937,10.49 13.335,11.151
  rectangle: 3.937,11.938 13.335,12.446
  rectangle: 3.937,13.462 13.335,13.919
  rectangle: 3.937,16.485 13.335,16.891
Board Outline:
  the board outline again, w0.254
Fabrication Notes:
  the board outline again, w0.254

## Dimensions
0,0 to 0,25.4 on Fabrication Notes

## Text inside footprints (layer, text, board x,y; h text height)
Designator15: Top Overlay "+" at 191.147,15.369 h1.02; Top Overlay "Anode  Cathode" at 190.729,17.069 h1.02; Top Overlay "-" at 202.947,15.469 h1.02
Designator20: Top Overlay "C" at 187.561,15.494 h1.02; Top Overlay "E" at 187.561,20.794 h1.02; Top Overlay "B" at 183.461,18.994 h1.02; Top Overlay "PNP" at 183.161,16.994 h1.02 r315
Designator46: Top Overlay "E" at 180.551,15.494 h1.02; Top Overlay "C" at 180.551,20.794 h1.02; Top Overlay "B" at 176.451,18.994 h1.02; Top Overlay "NPN" at 176.151,16.994 h1.02 r315
Designator47: Top Overlay "PMOS" at 185.535,7.35 h1.02 r337.5; Top Overlay "+" at 188.976,12.05 h1.02; Top Overlay "S" at 190.476,12.05 h1.02; Top Overlay "G" at 185.476,9.05 h1.02
Designator48: Top Overlay "S" at 196.725,6.711 h1.02; Top Overlay "G" at 191.724,9.711 h1.02; Top Overlay "+" at 195.224,12.711 h1.02; Top Overlay "SOWN" at 195.725,7.711 h1.02 r180
Designator64: Bottom Overlay "QFN X 40" at 67.547,19.85 h1.27; Bottom Overlay "AX SFEU / AX SFEU API" at 68.359,18.093 h1
Designator67: Bottom Overlay "TD1208R" at 34.029,14.532 h1.5 r90; Bottom Overlay "KEEPOUT" at 30.876,8.458 h0.4 r90; Bottom Overlay "1" at 36.22,19.837 h1.2 r270; Mechanical 13 "KEEPOUT" at 30.876,8.458 h0.4 r90; Mechanical 13 "TD1208R" at 33.426,8.992 h1.5 r90
Designator72: Bottom Overlay "1" at 150.901,15.596 h1.2 r270; Bottom Overlay "PRO-OB-471" at 118.161,5.522 h1.5 r270